# Altium PCB LED Controller.PcbDoc (part 2 of 2)
Units mm, origin at the board's own origin, x right, y up, seen from the top; angles counter-clockwise.
Board outline 41 x 37 mm, 2 copper layers (Top Layer, Bottom Layer), stack 1.62 mm thick; 53 components, 38 nets, 220 pads, 86 vias.
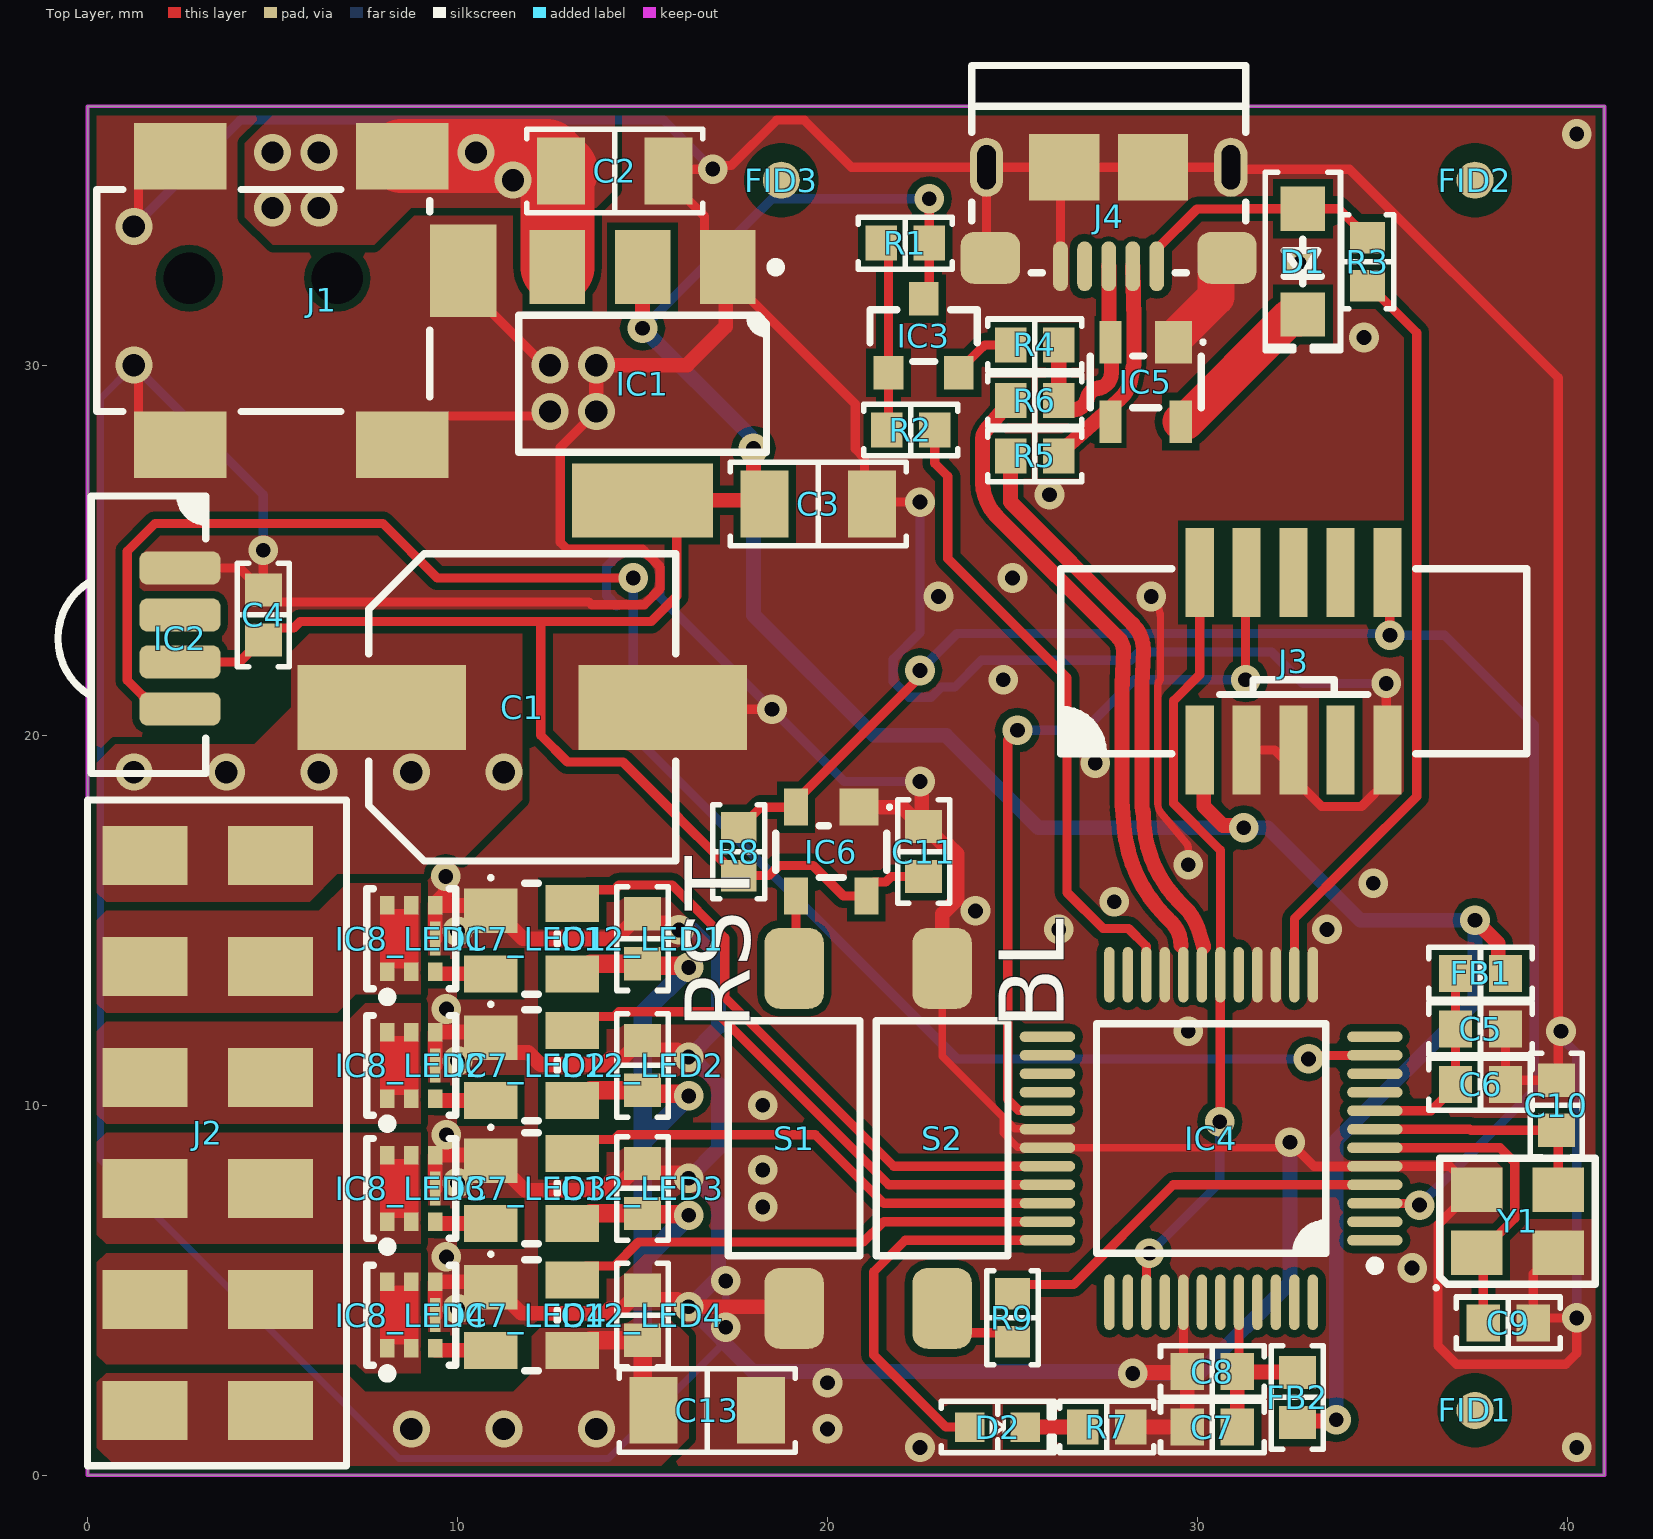
[diagram p0: Top Layer view]

## Via types
v1: diameter 0.8, hole 0.4, Top Layer to Bottom Layer, 66 vias
v2: diameter 1, hole 0.6, Top Layer to Bottom Layer, 20 vias

## Nets (pads, with @x,y where several pads share a name; then routed paths per layer and width w, separated by ;. In a path a pad name is that pad's centre, name@x,y a point inside that pad or via, vN(x,y) a via of type N, cw(c..) or ccw(c..) an arc to the next point about the centre after c; other vN are vias at no path point) (continued)
GND: (continued)
  Top Layer w0.25: v2(1.25,30) 1.375,29.875 1.375,28.625 2.15,27.85 J1.2@2.5,27.85 ; v2(1.25,33.75) 1.375,33.875 1.375,34.875 2.15,35.65 J1.2@2.5,35.65 ; IC2.1 4.105,24.52 4.7,23.925 C4.1 ; v1(4.75,25) C4.1 ; J1.2@8.5,27.85 9.275,28.625 12.375,28.625 v2(12.5,28.75) ; J1.3 10.15,32.2 12.35,30 v2(12.5,30) ; v2(13.75,28.75) 12.775,27.775 12.775,25.215 12.965,25.025 15,25.025 15.475,24.55 15.475,23.95 15.05,23.525 13.625,23.525 13.55,23.6 5.075,23.6 C4.1 ; C1.2@14,21.775 15.025,20.75 C1.2 15.6,20.7 v1(18.5,20.7) ; IC1.1@17.3,32.4 20.75,28.95 20.75,27.74 21,27.49 21,26.45 C3.1 21.25,26.3 v1(22.5,26.3) ; IC1.1 16.675,33.275 16.675,34.025 15.7,35 C2.1 15.75,35.3 v1(16.9,35.3) 16.998,35.398 17.398,35.398 18.625,36.625 19.375,36.625 20.65,35.35 J4.S@24.3,35.35 ; J4.S@24.4,32.9 24.3,33 J4.S@24.3,35.35 ; J4.5 26.3,35.25 J4.S@26.4,35.35 ; IC4.41 29.619,2.906 C8.1 ; J3.2 32.085,19.6 J3.3@32.6,19.085 ; v1(32.5,9) 33.15,8.35 IC4.5 36.815,8.35 Y1.4@37.45,7.715 ; J3.3 J3.3@32.6,19.085 ; v1(35.1,21.4) 35.1,19.64 J3.5 35.14,18.78 34.435,18.075 33.355,18.075 32.72,18.71 32.72,18.965 J3.3@32.6,19.085 ; Y1.4 Y1.4@37.45,7.715 ; C5.1 38.325,10.675 C6.1 38.435,10.675 C10.1 39.75,10.725 v1@39.75,12 ; Y1.2 39.65,6.015 39.075,5.44 C9.1 39.21,4.25 v1(40.25,4.25) 40.25,3.296 39.954,3 37,3 36.5,3.5 36.5,6.765 Y1.4@37.45,7.715 ; v1(39.825,12) 39.75,12.075 39.75,29.66 34.11,35.3 30.95,35.3 30.9,35.35 28.8,35.35 J4.S@26.4,35.35 ; J4.S@24.3,35.35 26.3,35.35 J4.S@26.4,35.35
  Top Layer w0.4: IC8_LED4.S@9.4,4.325 9.4,5.225 10.75,5.225 IC7_LED4.1 11.02,5.075 11.72,4.375 13.986,4.375 14.111,4.5 14.45,4.5 14.95,5 C12_LED4.1 15.25,4.75 v1@15.938,4.75 ; IC8_LED3.S@9.4,7.75 9.4,8.65 10.75,8.65 IC7_LED3.1 11.02,8.5 11.82,7.7 13.3,7.7 13.325,7.725 13.911,7.725 14.111,7.925 14.45,7.925 14.95,8.425 C12_LED3.1 15.25,8.175 v1@15.988,8.175 ; IC8_LED2.S@9.4,11.075 9.4,11.975 10.75,11.975 IC7_LED2.1 11.3,11.425 11.914,11.425 12.239,11.1 13.961,11.1 14.111,11.25 14.45,11.25 14.95,11.75 C12_LED2.1 15.25,11.5 v1@15.938,11.5 ; IC8_LED1.S@9.4,14.5 IC8_LED1.S@9.4,15.4 ; v1(9.683,16.183) 9.673,16.173 9.673,15.723 9.4,15.45 IC8_LED1.S@9.4,15.4 ; v2(13.75,28.75) v2(13.75,30) 16.2,30 17.25,31.05 17.25,32.4 17.25,32.6 IC1.1 ; v1(15.987,14.737) 15.879,14.737 15.691,14.925 15.25,14.925 C12_LED1.1 14.95,15.175 14.45,14.675 14.334,14.675 14.159,14.5 11.77,14.5 10.87,15.4 IC8_LED1.S@9.4,15.4 ; v1(16.246,4.55) 19.06,4.55 S1.2 ; IC6.1 22.025,18.055 22.55,17.53 C11.1 ; v1(22.5,18.75) 22.55,18.7 22.55,17.58 C11.1 ; S2.1 23.1,15.164 23.5,15.564 23.5,16.796 23.266,17.03 23.15,17.03 22.65,17.53 C11.1 ; R7.1 C7.1 C8.1 29.7,2.775 28.275,2.775 v1(28.25,2.75)
  Top Layer w1: IC5.1 29.35,30.7 30.5,31.85 30.5,32.7 30.7,32.9 J4.S@30.8,32.9
  Bottom Layer w0.2: v2(1.25,30) 0.35,29.1 0.35,8.519 8.419,0.45 14.081,0.45 17.25,3.619 v1(17.25,5.25)
  Bottom Layer w0.25: v2(1.25,30) 4.75,26.5 v1(4.75,25) ; v2(1.25,33.75) 4.125,36.625 15.575,36.625 v1(16.9,35.3) ; 14.3,23.5 14.025,23.775 14.025,24.55 14.45,24.975 15.05,24.975 15.475,24.55 15.475,23.725 20.45,18.75 v1(22.5,18.75) ; v1(22.5,26.3) 22.5,22.775 21.775,22.05 21.775,21.45 22.2,21.025 22.8,21.025 23.075,21.3 23.436,21.3 24.161,22.025 28.189,22.025 28.414,22.25 32,22.25 32.85,21.4 v1(35.1,21.4) ; v1(39.825,12) 39.825,11.829 40.25,11.404 v1(40.25,4.25)
  Bottom Layer w0.4: v1(15.987,14.737) 16,14.75 16.356,14.75 17.05,14.056 17.05,12.104 v1(16.246,11.3) 16.331,11.3 17.05,10.581 17.05,8.829 v1(16.246,8.025) 16.354,8.025 16.554,7.825 16.581,7.825 17.05,7.356 17.05,5.354 v1(16.246,4.55) 17.996,2.8 28.2,2.8 v1(28.25,2.75) 30.05,2.75 32.5,5.2 v1(32.5,9)
  other v1: 22.5,0.75 40.25,0.75 20,1.25 20,2.5 17.25,4 10,4.5 35.8,5.6 9.7,5.9 18.25,7.25 10,7.9 18.25,8.25 9.7,9.2 18.25,10 10,11.2 29.75,12 9.7,12.6 10,14.7 26.25,14.75 33.5,14.75 24,15.25 27.75,15.5 34.75,16 27.235,19.25 24.75,21.5 23,23.75 25,24.25 26,26.5 34.5,30.75 32.75,32.75 40.25,36.25
IR_RECV: IC2.4 IC4.11 | length 47.8
  Top Layer w0.25: IC2.4 1.85,20.71 1.075,21.485 1.075,24.973 1.827,25.725 7.977,25.725 9.452,24.25 v1(14.75,24.25) ; v1(33,11.25) 33.094,11.344 34.789,11.344 IC4.11
  Bottom Layer w0.25: v1(14.75,24.25) 14.75,20 23.5,11.25 v1(33,11.25)
ISP_BTN: R9.1 S2.2 | length 2.2
  Top Layer w0.25: S2.2 23.1,4.504 23.754,3.85 R9.1@25,3.85
ISP_EN: IC4.4 R9.2 | length 10.9
  Top Layer w0.25: R9.2@25,5.15 26.649,5.15 29.348,7.85 IC4.4
LED_CTL1: IC4.32 IC7_LED1.4 | length 17.1
  Top Layer w0.25: IC7_LED1.4 13.475,15.825 14.24,15.825 14.365,15.95 15.8,15.95 17.223,14.527 17.223,12.916 21.79,8.35 IC4.32
LED_CTL2: IC4.33 IC7_LED2.4 | length 15
  Top Layer w0.25: IC7_LED2.4 13.475,12.4 14.24,12.4 14.365,12.525 16.978,12.525 21.653,7.85 IC4.33
LED_CTL3: IC4.34 IC7_LED3.4 | length 13.8
  Top Layer w0.25: IC7_LED3.4 13.475,9.075 14.24,9.075 14.365,9.2 19.667,9.2 21.517,7.35 IC4.34
LED_CTL4: IC4.35 IC7_LED4.4 | length 13.5
  Top Layer w0.25: IC7_LED4.4 13.475,5.65 14.24,5.65 14.89,6.3 20.967,6.3 21.517,6.85 IC4.35
LED_OUT1: IC8_LED1.D J2.2
LED_OUT2: IC8_LED2.D J2.3
LED_OUT3: IC8_LED3.D J2.4
LED_OUT4: IC8_LED4.D J2.5
MR: IC6.3 S1.1 | length 2
  Top Layer w0.25: S1.1 19.15,13.75 IC6.3
RESET: IC4.3 IC6.2 J3.6 R8.1 | length 42.1
  Top Layer w0.25: R8.1 17.65,17.505 18.2,18.055 IC6.2 19.15,18.23 22.5,21.58 v1(22.5,21.75) ; IC4.3 34.8,7.344 35.956,7.344 v1(36,7.3) ; J3.6 35.1,24.36 35.2,24.26 v1(35.2,22.7)
  Bottom Layer w0.25: v1(22.5,21.75) 23.5,22.75 35.15,22.75 v1(35.2,22.7) 36.675,22.7 39.1,20.275 39.1,10.4 v1(36,7.3)
STATUS: D2.1 IC4.36 | length 10.7
  Top Layer w0.25: D2.1 23.2,1.3 21.25,3.25 21.25,5.5 22.1,6.35 IC4.36
STATUS_LED: D2.2 R7.2 | length 1.5
  Top Layer w0.4: D2.2 R7.2
SWCLK: IC4.29 J3.9 | length 20.9
  Top Layer w0.25: v1(25.135,20.135) 24.869,19.869 24.869,10.157 25.171,9.855 25.939,9.855 IC4.29 ; v1(31.3,21.5) 31.3,24.37 J3.9
  Bottom Layer w0.25: v1(25.135,20.135) 26.935,20.135 28.3,21.5 v1(31.3,21.5)
SWDIO: IC4.18 IC4.39 J3.10 | length 21.4
  Top Layer w0.25: IC4.39 28.625,4.68 28.625,5.925 v1(28.7,6) ; J3.10 30.06,21.64 29.355,20.935 29.355,18.153 30.619,16.888 IC4.18 30.614,13.519 30.614,9.563 v1(30.6,9.55)
  Bottom Layer w0.25: v1(28.7,6) 30.6,7.9 v1(30.6,9.55)
USB_CONN_PU: IC3.1 R1.1 R2.2 | length 4.8
  Top Layer w0.25: R1.1 21.65,33.1 IC3.1 R2.2@21.65,28.65 ; R2.2@21.95,28.3 R2.2@21.95,28.35
USB_CONNECT: IC4.22 R2.1 | length 17.5
  Top Layer w0.25: R2.1 22.9,27.35 23.25,27 23.25,24.775 26.475,21.55 26.475,15.75 27.45,14.775 28.137,14.775 28.614,14.298 28.614,13.53 IC4.22
USB_IN_D_N: IC5.3 J4.2 R5.1 | length 6.1
  Top Layer w0.407: R5.1 26.532,27.862 cw(c26.834,27.589) 26.567,27.896 27.247,28.488 ccw(c26.628,29.201) 27.264,28.503 27.461,28.683 27.902,29.084 ccw(c27.266,29.783) 27.907,29.089 ccw(c27.266,29.783) 28.19,29.589 28.273,29.981 ; J4.2 28.28,31.208 cw(c27.95,31.2) 28.281,31.2 28.281,30.05 ; 28.255,29.923 ccw(c27.95,30.05) 28.273,29.981 ; 28.273,29.981 ccw(c27.95,30.05) 28.281,30.05 ; 28.273,29.981 ccw(c27.95,30.05) 28.281,30.05
USB_IN_D_P: IC5.2 J4.3 R4.1 R6.1 | length 6.5
  Top Layer w0.407: R4.1 R6.1 ccw(c26.371,29.05) 26.285,28.965 26.349,28.905 ccw(c26.628,29.201) 27.027,29.118 cw(c27.35,29.05) 27.314,29.379 ccw(c27.266,29.783) 27.674,29.783 27.674,30.503 ccw(c27.435,30.503) 27.604,30.671 27.604,32.671 J4.3
USB_PU: IC3.2 R4.2 | length 1.7
  Top Layer w0.25: IC3.2 23.55,29.85 24.2,30.5 24.25,30.55 R4.2
USB_VBUS: IC4.14 R3.2 | length 20.6
  Top Layer w0.25: IC4.14 32.619,15.04 34.272,16.693 35.925,18.345 35.925,30.875 34.65,32.15 R3.2
USB_VIN: D1.1 J4.1 R3.1 | length 7
  Top Layer w0.25: J4.1 28.9,33.14 29.985,34.225 31.221,34.225 31.226,34.23 D1.1 33.82,34.23 34.25,33.8 34.25,33.75 34.55,33.45 R3.1
USBD_N: IC4.19 R5.2 | length 15.2
  Top Layer w0.407: R5.2 24.95,26.3 28.251,22.999 cw(c27.56,22.308) 28.537,22.308 28.537,22.307 cw(c27.593,22.307) 28.537,22.301 ; 28.537,22.3 cw(c27.593,22.307) 28.536,22.27 28.5,21.358 ccw(c29.169,21.331) 28.499,21.331 28.499,18.153 ccw(c29.355,18.153) 28.521,17.963 28.527,17.936 cw(c28.13,17.845) 28.537,17.849 ccw(c31.931,17.869) 29.531,15.469 29.751,15.249 29.83,15.134 29.832,15.132 cw(c28.659,14.315) 30.011,14.779 30.012,14.777 30.041,14.693 30.164,14.275
USBD_P: IC4.20 R6.2 | length 16.9
  Top Layer w0.407: 24.543,25.953 cw(c24.243,25.677) 24.561,25.931 24.57,25.92 27.87,22.62 cw(c27.557,22.307) 28,22.307 cw(c27.593,22.307) 28,22.303 cw(c27.593,22.307) 28,22.291 27.966,21.375 ccw(c29.169,21.331) 27.965,21.331 27.965,18.153 ccw(c29.355,18.153) 27.971,18.031 28.015,17.525 ccw(c31.931,17.869) 29.149,15.091 29.294,14.947 cw(c28.659,14.315) 29.555,14.315 ; 24.542,25.953 cw(c25.485,26.835) 24.194,26.835 24.194,28.025 cw(c24.525,28.025) 24.271,28.237 R6.2
VDD1_3V3: C5.2 C6.2 FB1.1 IC4.8 | length 5.5
  Top Layer w0.25: IC4.8 36.31,9.85 36.975,10.515 C6.2 C5.2 FB1.1
VDD2_3V3: C7.2 C8.2 FB2.1 IC4.44 | length 5
  Top Layer w0.25: C8.2 31.119,2.844 IC4.44
  Top Layer w0.4: C7.2 C8.2 31.087,2.788 32.688,2.788 FB2.1
XTALIN: C9.2 IC4.6 Y1.1 | length 8.8
  Top Layer w0.25: IC4.6 38.175,8.85 38.575,8.45 38.575,6.94 37.65,6.015 Y1.1 37.725,5.84 C9.2
XTALOUT: C10.2 IC4.7 Y1.3 | length 6.6
  Top Layer w0.25: IC4.7 37.359,9.35 37.384,9.325 C10.2 ; C10.2@39.65,9.325 39.75,9.225 Y1.3
pads on no net: FID1.F FID2.F FID3.F IC2.2 IC4.1 IC4.2 IC4.9 IC4.10 IC4.12 IC4.17 IC4.23 IC4.24 IC4.25 IC4.26 IC4.27 IC4.28 IC4.37 IC4.38 IC4.40 IC4.42 IC4.43 IC4.45 IC4.46 IC4.47 IC4.48 J1.M J3.4 J3.7 J3.8 J4.4

## Polygon pours and split planes (outlines as drawn)
GND on Top Layer "GND_L01_P020" (solid, remove dead copper, pour order 20): 0,37 0,0 41,0 41,37
12V on Top Layer "12V_L01_P017" (solid, remove dead copper, pour order 17): 5,36.75 4.25,36 4.25,34 5,33.25 7.75,33.25 8.75,34.25 13.75,34.25 14.25,34.75 14.25,36.75
12V on Top Layer "12V_L01_P018" (solid, remove dead copper, pour order 18): 0.5,2.75 0.25,2.5 0.25,0.75 0.75,0.25 15.5,0.25 16.25,1 16.25,3.75 15.75,4.25 12.5,4.25 12,3.75 12,2.75 11.5,2.25 7.5,2.25 7,2.75
12V on Top Layer "12V_L01_P012" (solid, remove dead copper, pour order 12): 0.424,2.82
12V on Top Layer "12V_L01_P019" (solid, remove dead copper, pour order 19): 0.5,15.5 0.25,15.75 0.25,19.25 0.75,19.75 4.5,19.75 5.5,20.75 5.5,22.25 6.5,23.25 6.75,23.5 11.25,23.5 11.75,23 11.75,18.25 9.75,16.25 6.75,16.25 6,15.5
LED_OUT1 on Top Layer "LED_OUT1_L01_P013" (solid, remove dead copper, pour order 13): 9,13 9,16 7,16 6.25,15.25 0.5,15.25 0.25,15 0.25,12.75 0.5,12.5 6.75,12.5 7.25,13
LED_OUT2 on Top Layer "LED_OUT2_L01_P014" (solid, remove dead copper, pour order 14): 9,9.5 9,12.75 7.5,12.75 7,12.25 0.5,12.25 0.25,12 0.25,9.75 0.5,9.5
LED_OUT3 on Top Layer "LED_OUT3_L01_P015" (solid, remove dead copper, pour order 15): 9,6.25 7.5,6.25 0.5,6.25 0.25,6.5 0.25,9 0.5,9.25 9,9.25
LED_OUT4 on Top Layer "LED_OUT4_L01_P016" (solid, remove dead copper, pour order 16): 9,2.75 9,6 0.5,6 0.25,5.75 0.25,3.25 0.5,3 7.25,3 7.5,2.75
GND on Bottom Layer "GND_L02_P023" (solid, remove dead copper, pour order 23): 0,0 0,37 41,37 41,0
12V on Bottom Layer "12V_L02_P021" (solid, remove dead copper, pour order 21): 5,36.75 4.25,36 4.25,27.5 5.5,26.25 5.5,21.5 11.75,21.5 11.75,36 11,36.75
12V on Bottom Layer "12V_L02_P022" (solid, remove dead copper, pour order 22): 6.75,23.5 11.25,23.5 11.75,23 11.75,18.25 9.75,16.25 6.75,16.25 6.75,3 7.5,2.25 11.5,2.25 12,2.75 12,3.75 12.25,4 16,4 16.25,3.75 16.25,1 15.5,0.25 0.75,0.25 0.25,0.75 0.25,19.25 0.75,19.75 4.5,19.75 5.5,20.75 5.5,22.25

## Keep-outs
Keep-Out Layer:
  the board outline again, w0.1

## Silkscreen, mask and mechanical layers (free items; w line width, h text height)
Top Overlay:
  text "RST" at 18.473,12.052 h3 r90
  text "BL" at 26.973,12.052 h3 r90
Bottom Overlay:
  rectangle: 7.4,0.6 8.5,18.1
  region: 0,27.499 1.25,28.749 1.25,32.75 2.75,34.25 2.744,34.256 0,34.256
  region: 8.5,34.088 8.505,34.088 11.417,37 8.489,37
  lines w0.3: 0,0.594 11.4,0.594 11.4,18.089 0,18.089
  text "12V IN" at 8.5,34.088 h3
  text "12V" at 7.5,15.594 h3
  text "GREEN" at 7.5,12.573 h3
  text "RED" at 7.5,9.573 h3
  text "BLUE" at 7.55,6.593 h3
  text "WHITE" at 7.5,3.593 h3
  text "LED STRIP" at 8.427,0.6 h3 r270
  text "12V" at 7.5,0.594 h3
Milling:
  lines w3: -1,-1.5 42,-1.5 ; -1,38.5 42,38.5